# EAGLE board doniczka_propozycja_przelotki (EAGLE 6.6.0)
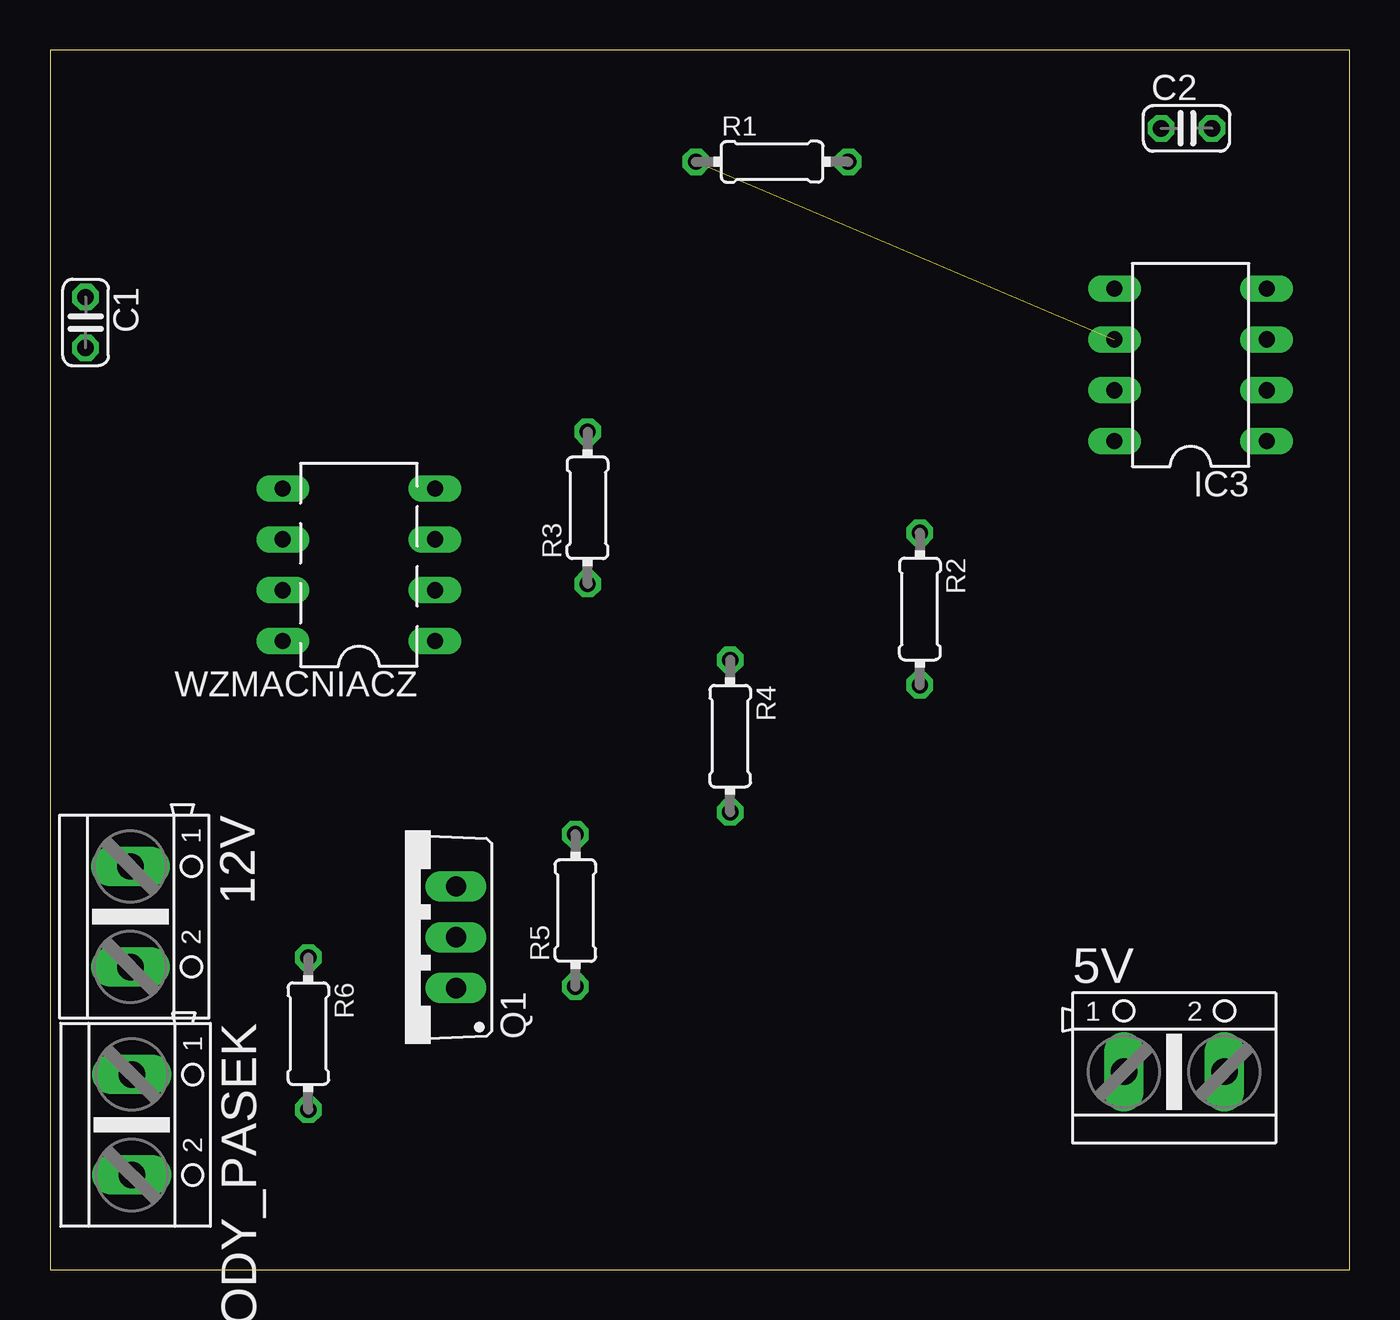
[diagram p0: board, top side]
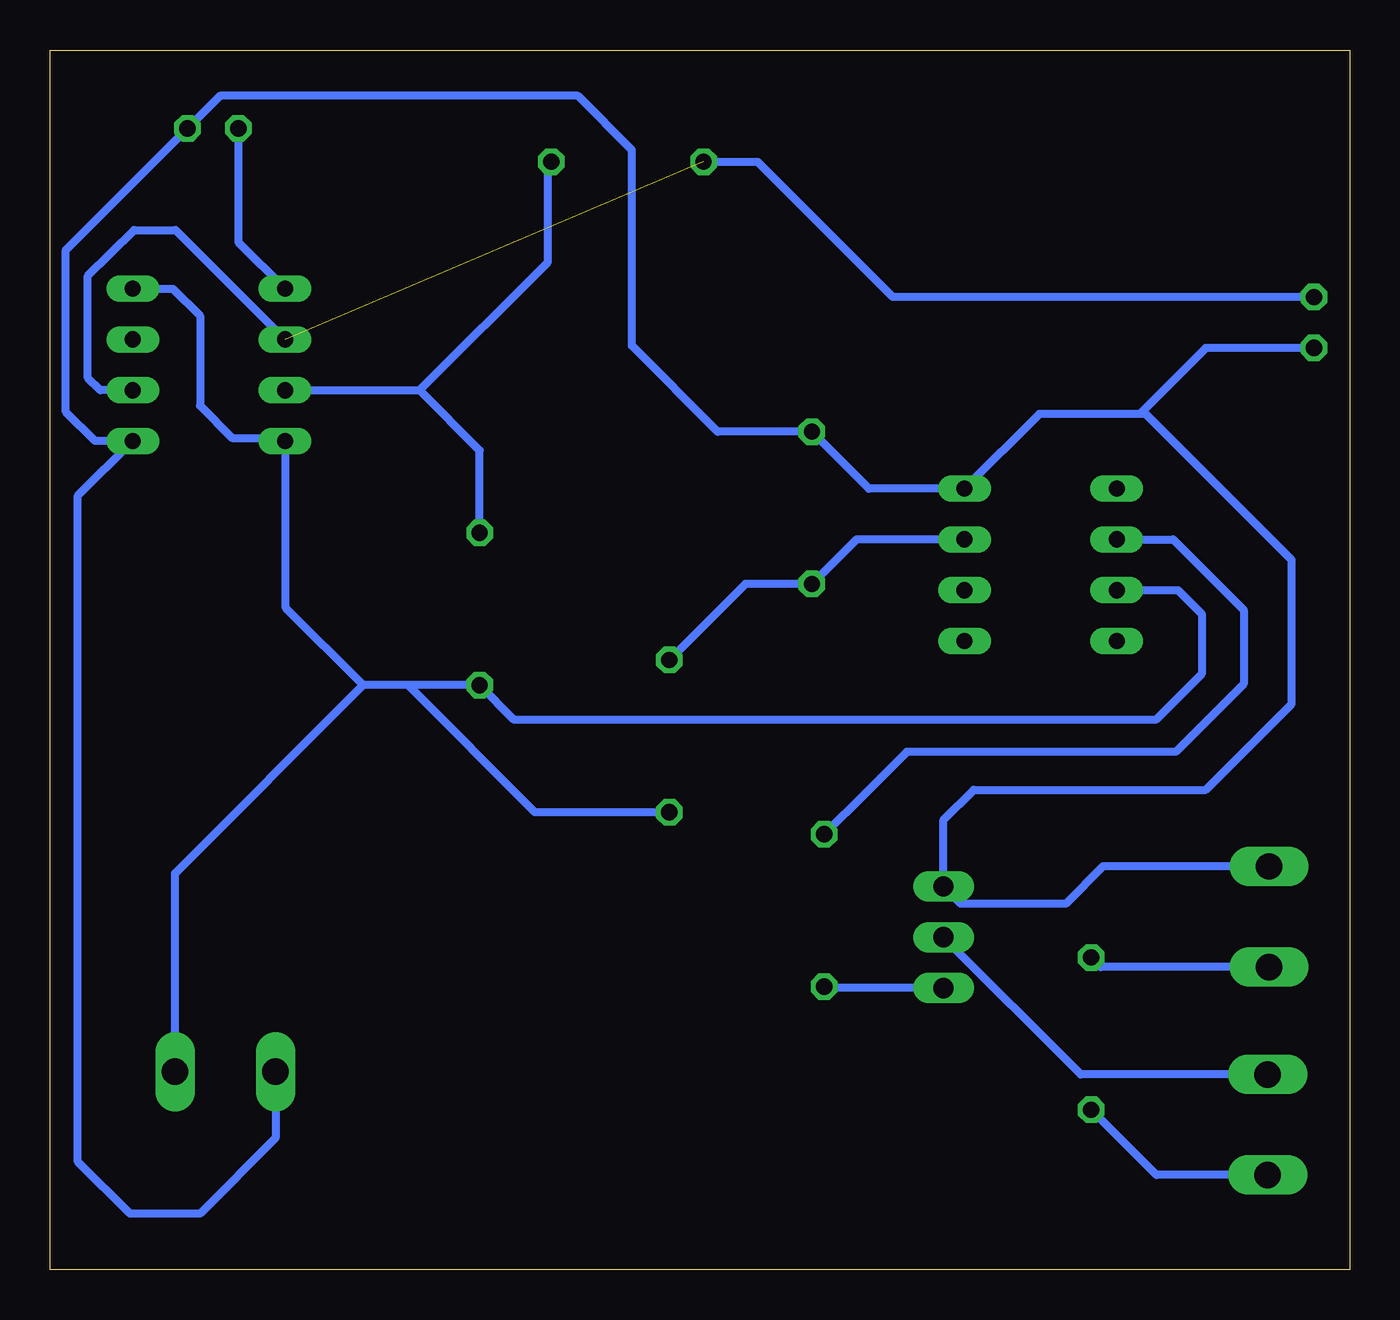
[diagram p1: board, bottom side, seen from below]

Size 65 x 61 mm. Coordinates in mm from the lower left corner, seen from the top.
Outline: 0,0 65,0 65,61 0,61 0,0
Copper layers (1*16): Top 0.035mm / dielectric 1.5mm / Bottom 0.035mm
Design rules "OpenLab": minimum track width 0.4mm, minimum drill 0.6mm, track to track 0.5mm, track to pad 0.5mm, pad to pad 0.5mm, via to via 0.5mm, smd to smd 0.1mm, copper to edge 2mm, drill to drill 0.2mm, minimum pad ring 10mil, minimum via ring 8mil, stop-mask expansion 4mil, vias tented up to drill 0mil, thermal gap 10mil

## Footprints (pad centres in the part's own frame; a part is rotated, then mirrored left to right if it is on the bottom)
AK500/2 = drill 1.321 long: 1 -2.515,0; 2 2.515,0
C025-024X044 = drill 0.813 octagon: 1 -1.27,0; 2 1.27,0
DIL-08 = drill 0.813 long: 1 -3.81,-3.81; 2 -1.27,-3.81; 3 1.27,-3.81; 4 3.81,-3.81; 5 3.81,3.81; 6 1.27,3.81; 7 -1.27,3.81; 8 -3.81,3.81
TO220BV = drill 1.016 long: D 0,-2.54; G -2.54,-2.54; S 2.54,-2.54
0204/7 = drill 0.813 octagon: 1 -3.81,0; 2 3.81,0
DIL08 = drill 0.813 pad 1.27 long: 1 -3.81,-3.81; 2 -1.27,-3.81; 3 1.27,-3.81; 4 3.81,-3.81; 5 3.81,3.81; 6 1.27,3.81; 7 -1.27,3.81; 8 -3.81,3.81

## Placement (x,y rotation side)
5V  [AK500/2]  56.23,9.89 0 top
12V  [AK500/2]  4.02,17.65 270 top
C1  [C025-024X044]  1.78,47.37 270 top
C2  [C025-024X044]  56.85,57.08 0 top
DIODY_PASEK  [AK500/2]  4.09,7.24 270 top
IC3  NE555  [DIL-08]  57.05,45.25 90 top
Q1  IRF740  [TO220BV]  17.77,16.62 90 top
R1  [0204/7]  36.12,55.41 0 top
R2  [0204/7]  43.51,33.04 270 top
R3  [0204/7]  26.89,38.1 90 top
R4  [0204/7]  34.02,26.68 270 top
R5  [0204/7]  26.28,17.96 90 top
R6  [0204/7]  12.92,11.8 270 top
WZMACNIACZ  TL081P  [DIL08]  15.45,35.25 90 top

## Library data of the parts
5V 12V DIODY_PASEK = con-ptr500; OC_FARNELL: unknown; OC_NEWARK: unknown
C1 C2 = rcl
IC3 = st-microelectronics; MF: Arrow Electronics; MPN: NE555N; OC_FARNELL: 1467742; OC_NEWARK: 89K1486
Q1 = transistor-power
R1-R6 = eagle-ltspice; SPICEMODEL: NONE; SPICEPREFIX: R
WZMACNIACZ = linear

## Nets
+12V: 12V.2 R6.1
GND: 5V.1 12V.1 C1.2 C2.2 IC3.1 Q1.S R3.2 WZMACNIACZ.4
N$1: R3.1 R4.1 WZMACNIACZ.3
N$2: IC3.7 R1.2 R2.1
N$3: WZMACNIACZ.2
N$4: C2.1 IC3.5
N$5: C1.1 IC3.2 IC3.6 R1.1
N$6: R5.2 WZMACNIACZ.6
N$7: Q1.G R5.1
N$8: DIODY_PASEK.2 R6.2
N$9: DIODY_PASEK.1 Q1.D
VCC: 5V.2 IC3.4 IC3.8 R2.2 R4.2 WZMACNIACZ.7

## Tracks (layer width: path | path; a pad name or v marks a point on that pad's centre or on a via)
+12V
  Bottom 0.406: 12V.2 12.45,15.13 R6.1
GND
  Bottom 0.406: 5V.1 53.72,6.58 57.5,2.8 61,2.8 63.6,5.4 63.6,38.7 IC3.1 62.74,41.44 64.2,42.9 64.2,51 58.5,56.7 C2.2 56.5,58.7 38.6,58.7 35.9,56 35.9,46.2 31.61,41.91 R3.2 24.04,39.06 WZMACNIACZ.4 15.52,42.8 10.5,42.8 | 12V.1 12.34,20.16 14.2,18.3 19.45,18.3 Q1.S 20.31,22.49 18.8,24 7.2,24 2.9,28.3 2.9,35.5 10.2,42.8 10.5,42.8 | C1.2 7.2,46.1 10.5,42.8
N$1
  Bottom 0.406: R4.1 30.22,34.29 R3.1 24.66,36.52 WZMACNIACZ.3
N$2
  Bottom 0.406: IC3.7 46.52,43.98 | 46.52,43.98 40.1,50.4 40.1,55.24 R1.2 | R2.1 43.51,40.97 46.52,43.98
N$4
  Bottom 0.406: C2.1 55.58,51.4 IC3.5
N$5  (1 unrouted)
  Bottom 0.406: IC3.2 62.48,43.98 63.1,44.6 63.1,49.7 60.8,52 58.72,52 IC3.6 | C1.1 22.84,48.64 29.61,55.41 R1.1
N$6
  Bottom 0.406: R5.2 24.23,23.82 23.45,24.6 22.15,25.9 8.7,25.9 5.3,29.3 5.3,33 8.82,36.52 WZMACNIACZ.6
N$7
  Bottom 0.406: Q1.G 26.21,14.08 R5.1
N$8
  Bottom 0.406: DIODY_PASEK.2 9.65,4.72 R6.2
N$9
  Bottom 0.406: DIODY_PASEK.1 13.45,9.76 Q1.D
VCC
  Bottom 0.406: WZMACNIACZ.7 8.58,33.98 7.4,32.8 7.4,29.8 9.7,27.5 41.78,27.5 R2.2 47.1,29.23 | 47.1,29.23 49.33,29.23 | 49.33,29.23 53.2,33.1 53.2,41.4 IC3.8 53.4,41.6 55.9,41.6 57.5,43.2 57.5,47.7 58.86,49.06 IC3.4 | R4.2 40.74,22.87 47.1,29.23 | 5V.2 58.74,19.82 49.33,29.23